# Altium PCB PCB_Oven.PcbDoc
Units mm, origin at the board's own origin, x right, y up, seen from the top; angles counter-clockwise.
Board outline 68.58 x 53.34 mm, 2 copper layers (Top Layer, Bottom Layer); 29 components, 33 nets, 124 pads, 10 vias.
Unrouted connection lines stored in the file: 3.
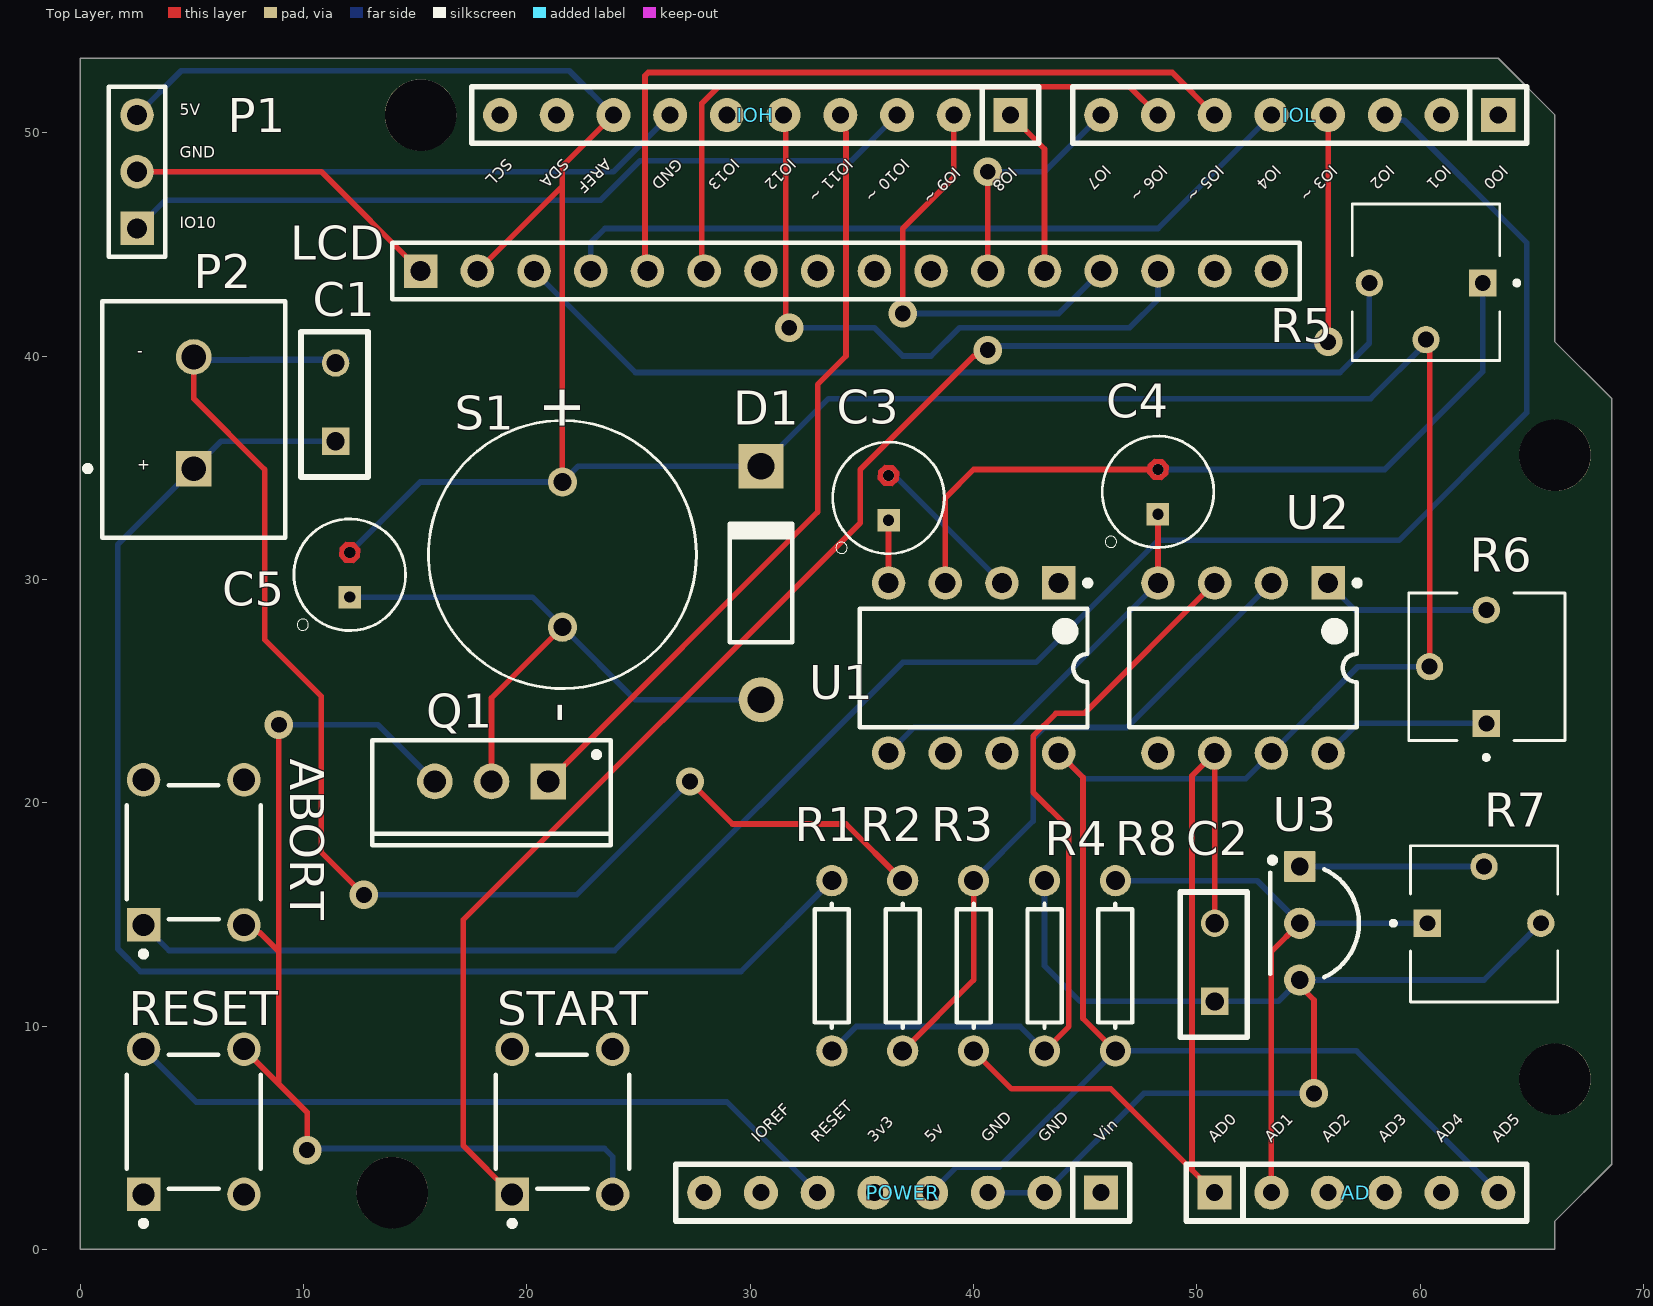
[diagram p0: Top Layer view]
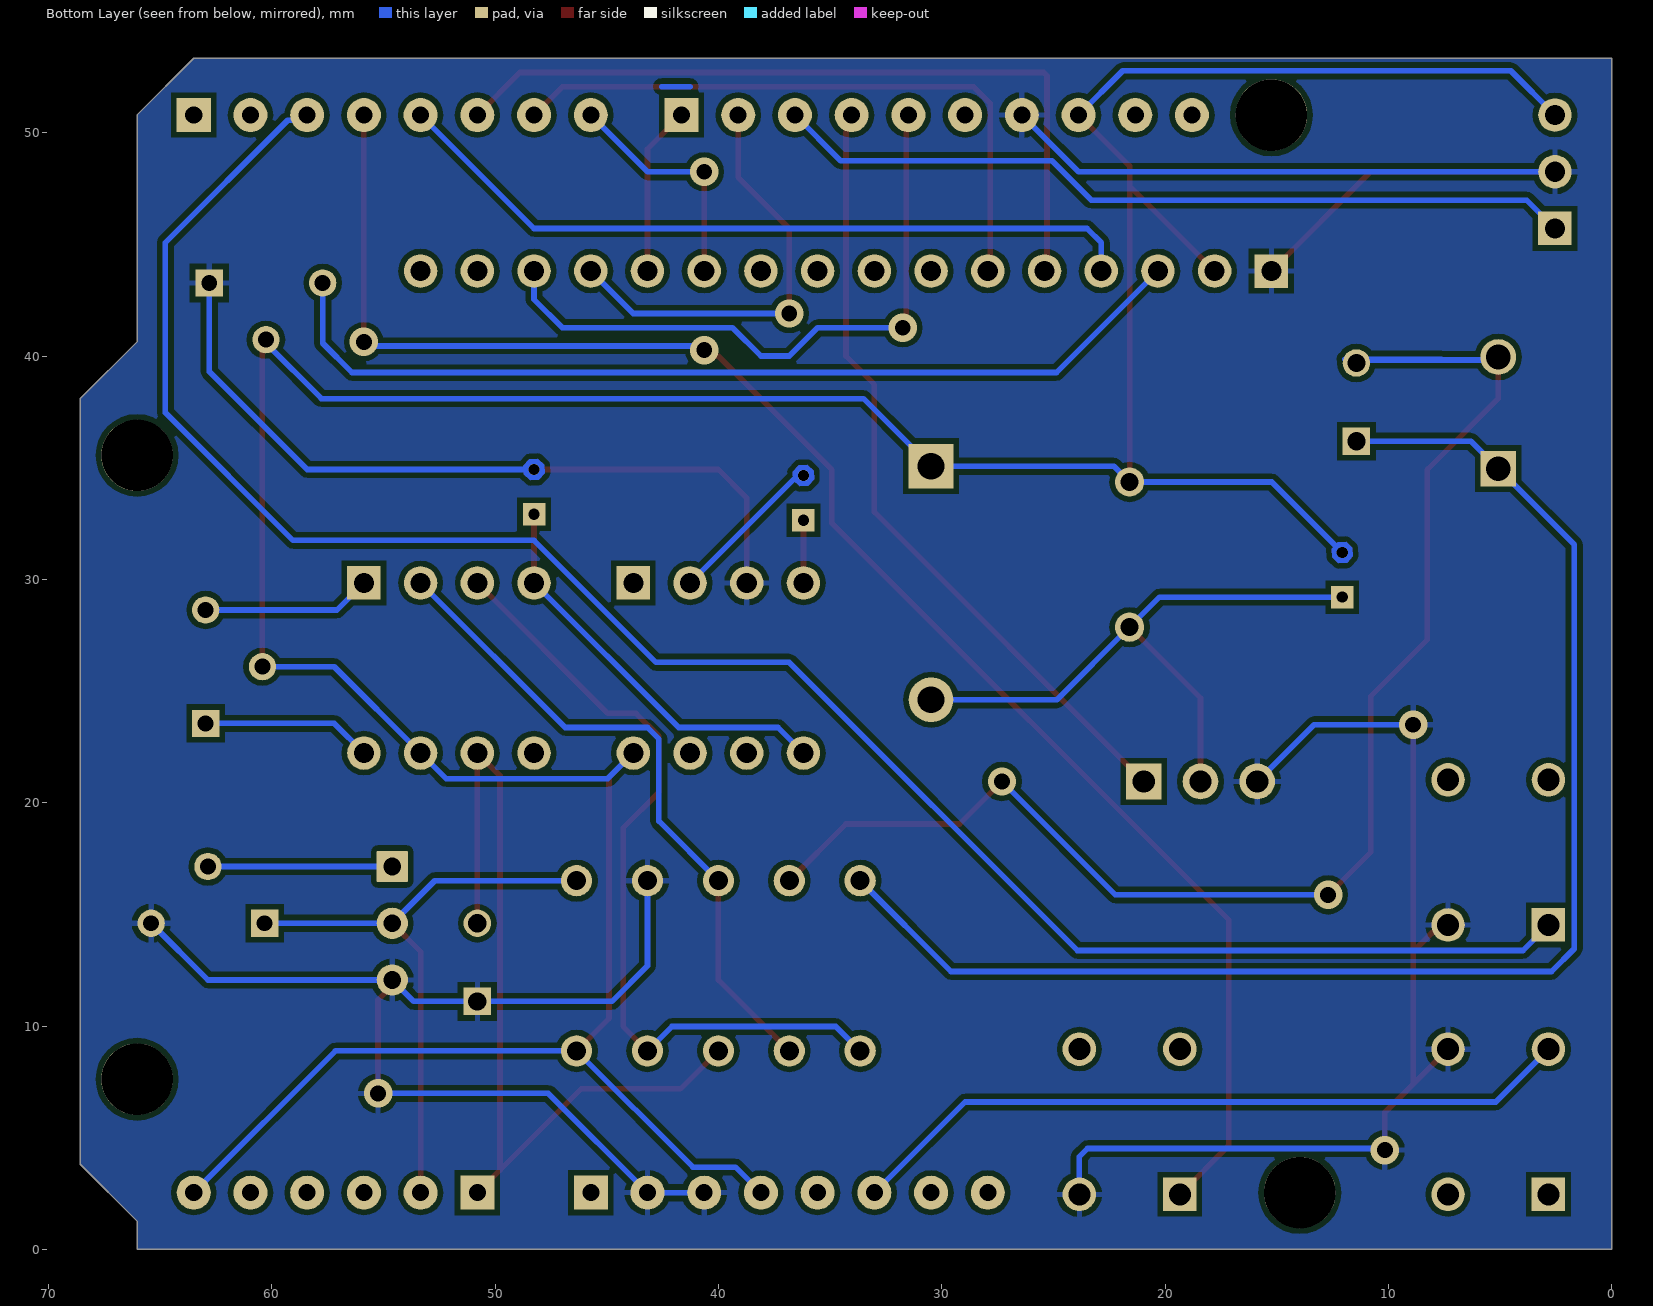
[diagram p1: Bottom Layer view, seen from below]

## Layer stack, top to bottom
Top Solder: solder mask 0.0102, Solder Resist, Dk 3.5
Top Layer: signal copper 0.0356
Dielectric1: dielectric 0.32, FR-4, Dk 4.8
Bottom Layer: signal copper 0.0356
Bottom Solder: solder mask 0.0102, Solder Resist, Dk 3.5

## Board outline
0,0 0,53.34 63.5,53.34 66.04,50.8 66.04,40.64 68.58,38.1 68.58,3.81 66.04,1.27 66.04,0

## Design rules (kind name [scope] priority, off if disabled: settings)
Clearance [All] p1: gap=0.24 ignorepadtopadclearanceinfootprint=TRUE except(0: Arc-Hole Track-Hole SMDPad-Hole THPad-Hole Via-Hole Fill-Hole Poly-Hole Region-Hole Text-Hole)
PolygonConnect PolygonConnect_1 [InNet('GND') vs IsNamedPolygon('Bottom Layer-No Net')] p1: connectstyle=Relief reliefconductorwidth=0.254 reliefentries=4 polygonreliefangle="90 Angle" airgapwidth=0.254
PolygonConnect [All] p2: connectstyle=Relief reliefconductorwidth=0.254 reliefentries=4 polygonreliefangle="90 Angle" airgapwidth=0.254
RoomDefinition PCB_Oven_Sch [InComponentClass('PCB_Oven_Sch')] p1 off: confinementstyle=ConfineIn formatcopy=TRUE lockcomponents=FALSE outline -30.48,-31.242 20.32,-31.242 20.32,-5.842 -30.48,-5.842
RoutingVias [All] p1: holewidth=0.711 width=1.27 viastyle="Through Hole" minholewidth=0.711 minwidth=1.27 maxholewidth=0.711 maxwidth=1.27
SilkToSolderMaskClearance SilkscreenOverComponentPads [IsPad] p1: minsilkscreentomaskgap=0.254 clearancetoexposedcopper=TRUE
SolderMaskExpansion [All] p1: expansion=0.102 istentingtop=FALSE
Width [All] p1: maxlimit=0.254 minlimit=0.254 preferedwidth=0.254
29 further rules are at their usual default settings.

## Components (designator, comment, footprint, x,y, rotation, side; value= is the part's Value field where it differs from the comment)
ABORT "1825910-6" TECO-1825910-6_V 5.08,17.78 r90 top
AD "AD" "Header 6x1 8.5mm" 50.8,2.54 r0 top locked
C1 "0.22uF" "0.22uF Thru hole" -206.617,103.093 r90 top value="0.22 uF"
C2 "0.22uF" "0.22uF Thru hole" -167.247,78.003 r90 top value="0.22 uF"
C3 "10uF POL" "CAP POL 10uF THRU" 36.195,33.655 r90 top value=10uF
C4 "10uF POL" "CAP POL 10uF THRU" 48.26,33.925 r90 top value=10uF
C5 "10uF POL" "CAP POL 10uF THRU" 12.065,30.21 r90 top value=10uF
D1 "Diode 1N4007" DO-41 30.48,29.845 r90 top
IOH "IOH" "Header 10x1 8.5mm" 41.656,50.8 r180 top locked
IOL "IOL" "Header 8x1 8.5mm" 63.5,50.8 r180 top locked
LCD "Header 16" HDR1X16 15.24,43.815 r0 top
P1 "Header 3" HDR1X3 2.54,45.72 r90 top
P2 "282836-2" TECO-282836-2_V 5.08,37.465 r90 top
POWER "POWER_UNO" "Header 8x1 8.5mm" 45.72,2.54 r180 top locked
Q1 "NMOS-2" TO-220AB 18.415,20.955 r180 top
R1 "Res1" AXIAL-0.3 33.655,12.7 r90 top value=330
R2 "Res1" AXIAL-0.3 36.83,12.7 r90 top value=330
R3 "Res1" AXIAL-0.3 40.005,12.7 r90 top value=100K
R4 "Res1" AXIAL-0.3 43.18,12.7 r90 top value=100K
R5 "20K" "Potentiometer 20K" 60.325,43.18 r180 top
R6 "20K" "Potentiometer 20K" 62.865,26.035 r90 top
R7 "20K" "Potentiometer 20K" 62.805,14.705 r0 top
R8 "Res1" AXIAL-0.3 46.355,12.7 r90 top value=2K
RESET "1825910-6" TECO-1825910-6_V 5.08,5.715 r90 top
S1 "CEM-1203(42) THRU" CEM-1203 21.59,31.115 r270 top
START "1825910-6" TECO-1825910-6_V 21.59,5.715 r90 top
U1 "LMC7660IN/NOPB" P0008A 40.005,26.035 r270 top
U2 "OP07CP" P0008A 52.07,26.035 r270 top
U3 "LM335Z/NOPB" LP0003A 54.61,14.605 r0 top

## Footprints (in the part's own frame and the unit in brackets; to place one, negate y for a bottom-side part, rotate by r counter-clockwise, add the part's x,y. Pads: shape width x height; smd on the part's side, far side on the other; paste and mask are expansions set on the pad)
"0.22uF Thru hole" [mm]
  rect 1.23x1.23 hole 0.82: 1(-66.898,-218.047)
  round 1.23 hole 0.82: 2(-63.398,-218.047)
  silkscreen extent -68.5,-219.5 -62,-216.5
AXIAL-0.3 [mm] "Axial Device, Thru-Hole; 2 Leads; 0.3 in Pin Spacing"
  round 1.4 hole 0.85: 1(-3.81,0) 2(3.81,0)
  silkscreen extent -2.77,-0.76 2.77,0.76
"CAP POL 10uF THRU" [mm] "Through Hole"
  rect 1.008x1.008 hole 0.5: NEG(-1,0)
  round 0.5 hole 0.5: POS(1,0)
  Top Layer region: 1.474,0.172 1.213,0.457 0.828,0.474 0.543,0.213 0.526,-0.172 0.787,-0.457 1.172,-0.474 1.457,-0.213
  Bottom Layer region: 1.474,0.172 1.213,0.457 0.828,0.474 0.543,0.213 0.526,-0.172 0.787,-0.457 1.172,-0.474 1.457,-0.213
  Multi-Layer region: 1.474,0.172 1.213,0.457 0.828,0.474 0.543,0.213 0.526,-0.172 0.787,-0.457 1.172,-0.474 1.457,-0.213
  silkscreen extent -2.5,-2.5 2.5,2.5
CEM-1203 [mm] "2048 Hz Speaker"
  round 1.308 hole 0.8: N(3.25,0) P(-3.25,0)
  silkscreen extent -6,-6 6,6
DO-41 [mm] "Diode, Axial; Body 5.2 x 2.7 mm (LxDia. max), Lead Dia. 0.86 mm (max)"
  round 2 hole 1.2: 1(-5.23,0)
  rect 2x2 hole 1.2: 2(5.23,0)
  silkscreen extent -2.65,-1.4 2.75,1.4
HDR1X3 [mm] "Connector; Header; 3 Position"
  rect 1.5x1.5 hole 0.9: 1(0,0)
  round 1.5 hole 0.9: 2(2.54,0) 3(5.08,0)
  silkscreen extent -1.27,-1.27 6.35,1.27
HDR1X16 [mm] "Connector; Header; 16 Position"
  rect 1.5x1.5 hole 0.9: 1(0,0)
  round 1.5 hole 0.9: 2(2.54,0) 3(5.08,0) 4(7.62,0) 5(10.16,0) 6(12.7,0) 7(15.24,0) 8(17.78,0) 9(20.32,0) 10(22.86,0) 11(25.4,0) 12(27.94,0) 13(30.48,0) 14(33.02,0) 15(35.56,0) 16(38.1,0)
  silkscreen extent -1.27,-1.27 39.37,1.27
"Header 6x1 8.5mm" [mil] "Stackable 6 pin header"
  rect 60x60 hole 30: 1(0,0)
  round 60 hole 30: 2(100,0) 3(200,0) 4(300,0) 5(400,0) 6(500,0)
  silkscreen extent -50,-50 550,50, body extent -50,-50 550,50, height 335
"Header 8x1 8.5mm" [mil] "Stackable 8 pin header"
  rect 60x60 hole 30: 1(0,0)
  round 60 hole 30: 2(100,0) 3(200,0) 4(300,0) 5(400,0) 6(500,0) 7(600,0) 8(700,0)
  silkscreen extent -50,-50 750,50, body extent -50,-50 750,50, height 335
"Header 10x1 8.5mm" [mil] "Stackable 10 pin header"
  rect 60x60 hole 30: 1(0,0)
  round 60 hole 30: 2(100,0) 3(200,0) 4(300,0) 5(400,0) 6(500,0) 7(600,0) 8(700,0) 9(800,0) 10(900,0)
  silkscreen extent -50,-50 950,50, body extent -50,-50 950,50, height 335
LP0003A [mm] "TO, Flat Index; 3 In-Line, Formed Axial Leads; Body Dia. 4.8mm; Leads 0.56 x 0.41 mm (max)"
  rrect7% 1.4x1.4 hole 0.8: 1(0,2.54)
  round 1.4 hole 0.8: 2(0,0) 3(0,-2.54)
  silkscreen extent -1.35,-2.41 2.65,2.95, body extent -1.33,-2.83 2.35,2.83, height 9.01
P0008A [mm] "DIP, 8-Leads, Body 10.15x6.6mm, Pitch 2.54mm"
  rect 1.5x1.5 hole 0.9: 1(-3.81,3.81)
  round 1.5 hole 0.9: 2(-3.81,1.27) 3(-3.81,-1.27) 4(-3.81,-3.81) 5(3.81,-3.81) 6(3.81,-1.27) 7(3.81,1.27) 8(3.81,3.81)
  silkscreen extent -3.93,-5.1 2.65,5.24, body extent -3.95,-5.07 3.95,5.07, height 5.08
"Potentiometer 20K" [mm]
  rect 1.222x1.222 hole 0.714: 1(-2.48,-0.1)
  round 1.222 hole 0.714: 2(0.06,2.44) 3(2.6,-0.1)
  silkscreen extent -4.1,-3.63 3.36,3.37
TECO-282836-2_V [mm] "Female Header, Pitch 5mm, 1 x 2 Position, Height 10mm"
  rect 1.6x1.6 hole 1.1: 1(-2.5,0)
  round 1.6 hole 1.1: 2(2.5,0)
  silkscreen extent -5.6,-4.1 5,4.87, body extent -5.6,-4.1 5,4.1, height 10
TECO-1825910-6_V [mm] "Switch, 4-Leads, Body 5.99x5.99mm"
  rect 1.5x1.5 hole 0.99: 1(-3.25,2.25)
  round 1.5 hole 0.99: 2(3.25,2.25) 3(-3.25,-2.25) 4(3.25,-2.25)
  silkscreen extent -4.67,-3 3,3, body extent -3,-2.99 2.99,3, height 5
TO-220AB [mm] "TO, Thru-Hole, Vertical, Heatsink Mounted; 3 In-Line Leads; Pitch 2.54 mm"
  rect 1.6x1.6 hole 1: 1(-2.54,0)
  round 1.6 hole 1: 2(0,0) 3(2.54,0)
  silkscreen extent -5.35,-1.85 5.35,2.85, body extent -5.4,-1.9 5.4,2.9, height 19.3

## Part data
ABORT RESET START: library part CMP-1684-00021-1, "Tact Switch, SPST-NO, 0.05 A, -35 to 85 degC, 4-Pin THD, RoHS, Bulk", Actuator Color=Black, Contact Rating @ Voltage=0.05A@24VDC, Dielectric Strength=500VAC, Manufacturer="TE Connectivity", Maximum AC Voltage Rating=N/A, Maximum Contact Resistance=100mOhm, Maximum DC Voltage Rating=24V, Minimum Insulation Resistance=100MOhm, Operating Temperature=-35to85C, Package Description="4-Pin Through Hole Device, Body 5.99 x 5.99 mm, Pitch 6.5 mm", Package Reference=THD, Actuator Length=1.4mm, Actuator Material=PolybutyleneTerephthalate, Actuator Style=RoundButton, Base Material=N/A, Body Orientation=Straight, Bushing Type=Unthreaded, Contact Material=CopperAlloy, Contact Plating=Silver, Datasheet URL=http://www.te.com/commerce/DocumentDelivery/DDEController?Action=showdoc&DocId=Customer+Drawing%7F1825910%7FC9%7Fpdf%7FEnglish%7FENG_CD_1825910_C9.pdf%7F1825910-6, Datasheet Version="Rev. C9", Dimension=5.99x5mm, Electrical Life=100000Cycles, Family=1825910, Function=MomentaryContact, Housing Material=N/A, Illumination=N/R, Manufacturer URL=http://www.te.com, Mechanical Life=100000Cycles, Mounting=ThroughHole, Packaging=N/A, Part No=1825910-6, Pole Throw Configuration=SPST, Product Weight=N/A, RoHS=Yes, Seal Description=N/A, Seal Location=N/A, Switch Configuration=OFF(ON), Terminal Type=PCPins, Thread Size=N/R
AD: Supplier Part Number 1=2699089, Supplier 1=Arrow, Supplier 2=Digi-Key, Supplier 3=Arrow, Supplier 4=Arrow, Supplier Part Number 2=SAM1198-06-ND, Supplier Part Number 3=2699088, Supplier Part Number 4=2699075
C1 C2: library part "CAP 0.22uF", "CAP CER 0.22UF 200V", Package="Through Hole Radial", Rating=200V, Tolerance=10%, ComponentLink1Description=digikey, ComponentLink1URL=https://www.digikey.ca/product-detail/en/kemet/C317C221K2G5TA7301/399-13974-1-ND/6562545, Digikey=399-13974-1-ND, Digikey Link=https://www.digikey.ca/product-detail/en/kemet/C317C221K2G5TA7301/399-13974-1-ND/6562545, MF=KEMET, MP=C317C221K2G5TA7301, Price="0.49 CAD"
C3 C4 C5: library part "CAP POL 10uF THRU", "CAP ALUM 10UF 20% 50V RADIAL", Package="Through Hole Radial", Tolerance=20%, Usage Rating="2000hrs @ 85C", Voltage Rating=50V, ComponentLink1Description="Digikey Link", ComponentLink1URL=https://www.digikey.ca/product-detail/en/panasonic-electronic-components/ECA-1HM100I/P10425CT-ND/8603345, Digikey PN=P10425CT-ND, MF="Panasonic Electronic Components", MP=ECA-1HM100I, Price="0.31 CAD", Type="Aluminum Electrolytic"
D1: "1 Amp General Purpose Rectifier", Code_JEDEC=DO-204-AL, ComponentLink1Description="Manufacturer Link", ComponentLink1URL=http://www.fairchildsemi.com/, ComponentLink2Description=Datasheet, ComponentLink2URL=http://www.fairchildsemi.com/ds/1N%2F1N4001.pdf, DatasheetVersion=1998, LatestRevisionDate=17-Jul-2002, LatestRevisionNote="Re-released for DXP Platform.", PackageDescription="Diode, Axial; Body 5.2 x 2.7 mm (LxDia. max), Lead Dia. 0.86 mm (max)", PackageReference=DO-41, PackageVersion=Aug-1999, Published=8-Jun-2000, Publisher="Altium Limited"
IOH: Supplier Part Number 1=2698803S4475693N1004, Supplier 1=Arrow, Supplier 2=Digi-Key, Supplier 3=Arrow, Supplier Part Number 2=SAM1198-10-ND, Supplier Part Number 3=2698789
IOL POWER: Supplier Part Number 1=SAM1198-08-ND, Supplier 1=Digi-Key, Supplier 2=Arrow, Supplier 3=Arrow, Supplier 4=Arrow
  IOL: Supplier Part Number 2=2698939, Supplier Part Number 3=2698940, Supplier Part Number 4=2698925
  POWER: Supplier Part Number 2=2698940, Supplier Part Number 3=2698925, Supplier Part Number 4=2698939
LCD: "Header, 16-Pin", LatestRevisionDate=17-Jul-2002, LatestRevisionNote="Re-released for DXP Platform.", Publisher="Altium Limited"
P1: "Header, 3-Pin", LatestRevisionDate=17-Jul-2002, LatestRevisionNote="Re-released for DXP Platform.", Publisher="Altium Limited"
P2: library part CMP-1684-00017-1, "Female Header, Pitch 5 mm, 1 x 2 Position, Height 10 mm, Tail Length 3.5 mm, Rohs, Bulk", Color=Green, Current=13.5A, Manufacturer="TE Connectivity", Package Description="Female Header, Pitch 5 mm, 1 x 2 Position, Height 10 mm, Tail Length 3.5 mm", Package Reference=THD, Standard Package=300, Voltage=300V, 3D Model=282836-2.pdf, Category=Connectors,Interconnects, Clamp Material - Plating=Brass-NickelPlated, Contact Material - Plating=Brass-TinPlated, Datasheet URL=http://www.te.com.cn/commerce/DocumentDelivery/DDEController?Action=showdoc&DocId=Catalog+Section%7F1308389_EUROSTYLE_TERMINAL_BLOCKS%7F0607%7Fpdf%7FEnglish%7FENG_CS_1308389_EUROSTYLE_TERMINAL_BLOCKS_0607.pdf%7F282836-2, Dynamic Catalog=BuchananSeries, Family=TerminalBlocks-WiretoBoard, Featured Product=EurostyleTerminalBlockConnectors, Features=Interlocking(Side), Housing Material=Polyamide(PA66),Nylon6/6, Manufacturer URL=http://www.te.com, Mating Orientation=HorizontalwithBoard, Mounting Type=ThroughHole, Number of Levels=1, Other Names="5ULV-02B / A98076", Packaging=Bulk, Pitch="0.197\"(5.00mm)", Positions Per Level=2, Product Training Modules=Wire-to-BoardEurostyleTerminalBlocks, RoHS Information=282836-2StatementofCompliance, Screw Material - Plating=Brass-NickelPlated, Screw Thread=M3, Series=Buchanan, Torque - Screw=0.68Nm(6Lb-In), Wire Gauge=16-30AWG, Wire Termination=Screw-RisingCageClamp
Q1: "N-Channel Power MOSFET", ComponentLink1Description="Manufacturer Link", ComponentLink1URL=http://www.irf.com/, DatasheetVersion=PD-9.814, LatestRevisionDate=17-Jul-2002, LatestRevisionNote="Re-released for DXP Platform.", Note="Pin 2 is electrically connected to pin 4.", PackageDescription="TO, Thru-Hole, Vertical, Heatsink Mounted; 3 In-Line Leads; Pitch 2.54 mm", PackageReference=TO-220AB, PackageVersion=Feb-1997, Published=8-Jun-2000, Publisher="Altium Limited"
R1 R2 R3 R4 R8: "Resistor", LatestRevisionDate=17-Jul-2002, LatestRevisionNote="Re-released for DXP Platform.", PackageDescription="Axial Device, Thru-Hole; 2 Leads; 0.3 in Pin Spacing", PackageReference=AXIAL-0.3, Published=8-Jun-2000, Publisher="Altium Limited"
R5 R6 R7: library part "POT 20K THRU", "TRIMMER 20K OHM 0.5W PC PIN TOP - Phillips Screw head", Package="Through Hole", ComponentLink1Description="Digikey Link", ComponentLink1URL=https://www.digikey.ca/product-detail/en/bourns-inc/3362P-1-203RLF/3362P-1-203RLFCT-ND/3767981, ComponentLink2Description="SnapEDA Link (205, since 203 DNE)", ComponentLink2URL=https://www.snapeda.com/parts/3362P-1-205LF/Bourns%20-%20J.W.%20Miller/view-part/463695/, Digikey=3362P-1-203RLF, MF="Bourns Inc.", MP=3362P-1-203RLF, Price="3.05 CAD"
S1: "35mA 2.048kHz 85dB @ 3.5V", Current Rating="35 mA @ 3.5 V", Frequency="2.048 kHz @ 3.5 V", Rated Voltage="3-5 V", ComponentLink1Description="Digikey Link", ComponentLink1URL=https://www.digikey.ca/products/en?keywords=CEM%201203%20buzzer, ComponentLink2Description="SnapEDA Link", ComponentLink2URL=https://www.snapeda.com/parts/CEM-1203%2842%29/CUI%20Devices/view-part/?ref=search&t=CEM%201203, Decibels="85 dB @ 3.5 V", Digikey PN=102-1153-ND, MF="CUI Devices", MP=CEM-1203(42), Price="1.13 CAD"
U1: library part CMP-0065-00002-3, "Switched Capacitor Voltage Converter, 8-pin MDIP, Pb-Free", Manufacturer="Texas Instruments", PackageTopMarking=NSUZXYTTE#*LMC*7660IN, PowerWise=N, Code_JEDEC=MS-001-BA, ComponentLink1Description="Datasheet URL", ComponentLink1URL=http://www.ti.com/general/docs/lit/getliterature.tsp?genericPartNumber=LMC7660&fileType=pdf, CompType="Switch Caps", PackageDescription="MDIP, .365 x .250 x .130in, 8 Lead, .100in Pitch", PackageReference=P0008A, PinCount=8, RoHS=Y
U2: library part CMP-0017-00916-2, "Low-Offset Voltage Operational Amplifier, 6 to 36 V, 0 to 70 degC, 8-pin DIP (P8), Pb-Free (RoHS)", Manufacturer="Texas Instruments", Rating=Catalog, Total Supply Voltage(Max)(+5V is 5, +/-5V is 10)=36, Total Supply Voltage(Min)(+5V is 5, +/-5V is 10)=6, CMRR(Min)(dB)=100, Code_JEDEC=MS-001, ComponentLink1Description="Manufacturer URL", ComponentLink1URL=http://www.ti.com/, ComponentLink2Description=Datasheet, ComponentLink2URL=http://www.ti.com/lit/ds/symlink/op07c.pdf, ComponentLink3Description="Package Specification", ComponentLink3URL=http://www.ti.com/litv/pdf/mpdi001b, DatasheetVersion=SLOS099E, Eco-Plan="Pb-Free (RoHS)", GBW(Typ)(MHz)=0.6, IIB(Max)(pA)=7000, Iq per channel(Max)(mA)=5, Mounting Technology="Through Hole", Number of Channels=1, Offset Drift(Typ)(uV/C)=0.5, PackageDescription="8-Pin Plastic In-Line, Body 9.59 x 6.35 mm, Pitch 2.54 mm", PackageReference=P0008A, PackageVersion="4040082/E, 04/2010", PartNumber=OP07CP, Slew Rate(Typ)(V/us)=0.3, Sub Family="General Purpose Amplifier, High Supply Voltage Amplifier (>=30V), Low Noise Amp (<=10nV/rtHz), Low Offset Voltage Amplifier (<=500uV)", Vio (25C)(Max)(mV)=0.15, Vn at 1kHz(Typ)(nV/rtHz)=9.8
U3: library part CMP-0066-00016-3, "Precision Temperature Sensor, 3-pin TO-92, Pb-Free", Manufacturer="Texas Instruments", PackageTopMarking=NSXYTT*LM335*Z, PowerWise=N, Code_JEDEC=TO-226-AA, ComponentLink1Description="Datasheet URL", ComponentLink1URL=http://www.ti.com/general/docs/lit/getliterature.tsp?genericPartNumber=LM335&fileType=pdf, CompType="Temp Sensor IC", PackageDescription="TO-92, Molded, 3 Lead", PackageReference=LP0003A, PinCount=3, RoHS=Y

## Free pads (board coordinates)
  round 3.2 hole 3.2: 0(13.97,2.54) 0(15.24,50.8) 0(66.04,7.62) 0(66.04,35.56)

## Via types
v1: diameter 1.27, hole 0.711, Top Layer to Bottom Layer, 10 vias

## Nets (pads, with @x,y where several pads share a name; then routed paths per layer and width w, separated by ;. In a path a pad name is that pad's centre, name@x,y a point inside that pad or via, vN(x,y) a via of type N, cw(c..) or ccw(c..) an arc to the next point about the centre after c; other vN are vias at no path point)
5V: AD.6 C5.POS D1.2 IOH.8 LCD.2 P1.3 POWER.4 R5.2 R6.2 R8.1 S1.P U1.8 U2.7 | length 177
  Top Layer w0.254: LCD.2 21.59,47.625 ; S1.P 21.59,47.625 ; IOH.8 21.59,48.514 21.59,47.625 ; U1.8 44.907,21.133 44.907,10.338 R8.1 ; R5.2 60.425,40.58 R6.2
  Bottom Layer w0.254: P1.3 4.521,52.781 21.895,52.781 IOH.8 ; C5.POS 15.22,34.365 S1.P 22.3,35.075 D1.2 33.505,38.1 57.785,38.1 60.265,40.58 R5.2 R5.2@60.325,40.8 ; POWER.4 39.243,3.683 41.148,3.683 R8.1 57.15,8.89 AD.6 ; U1.8 44.958,21.082 52.197,21.082 U2.7 57.21,26.095 R6.2
AD0: AD.1 C2.2 R3.1 U2.6 | length 40.1
  Top Layer w0.254: R3.1 41.707,7.188 46.152,7.188 49.784,3.556 ; AD.1 49.784,3.556 ; C2.2 U2.6 49.784,21.209 49.784,3.556
AD1: AD.2 R7.1 R8.2 U3.2 | length 27.4
  Top Layer w0.254: AD.2 53.34,13.335 U3.2
  Bottom Layer w0.254: R8.2 52.705,16.51 U3.2 R7.1
GND: ABORT.3 C2.1 C4.POS IOH.7 LCD.1 P1.2 POWER.2 POWER.3 Q1.3 R4.2 R5.1 R7.3 RESET.4 START.3 U1.3 U3.3 | length 171
  Top Layer w0.254: P1.2 10.795,48.26 LCD.1 ; RESET.4 8.89,7.405 ; ABORT.3 7.667,14.53 8.03,14.167 8.058,14.167 8.89,13.335 ; v1(8.89,23.495) 8.89,13.335 ; v1(10.16,4.445) 10.16,6.135 8.89,7.405 ; U1.3 38.735,33.655 40.005,34.925 C4.POS ; U3.3 54.61,11.806 55.245,11.171 v1(55.245,6.985) ; 8.89,7.405 8.89,13.335
  Bottom Layer w0.254: P1.2 23.876,48.26 IOH.7 ; v1(8.89,23.495) 13.335,23.495 Q1.3 ; v1(10.16,4.445) 10.236,4.521 23.474,4.521 23.84,4.155 START.3 ; POWER.3 POWER.2 47.625,6.985 v1(55.245,6.985) ; R4.2 43.18,12.7 44.775,11.105 C2.1 53.65,11.105 U3.3 62.865,12.065 R7.3 ; C4.POS 58.42,34.925 62.805,39.31 R5.1
IO0: IOL.1
IO1: IOL.2
IO2: ABORT.1 IOL.3 | length 88.7
  Bottom Layer w0.254: ABORT.1 3.974,13.386 23.927,13.386 36.83,26.289 42.799,26.289 48.26,31.75 59.055,31.75 64.77,37.465 64.77,45.085 59.292,50.563 58.657,50.563 IOL.3
IO3: IOL.4 START.1 | length 74.2
  Top Layer w0.254: START.1 17.145,4.66 17.145,14.757 34.925,32.537 34.925,34.925 39.995,39.995 40.087,39.995 40.365,40.273 v1(40.64,40.273) ; v1(55.88,40.64) IOL.4
  Bottom Layer w0.254: v1(40.64,40.273) 40.823,40.457 55.697,40.457 v1(55.88,40.64)
IO4: IOL.5 LCD.4 | length 34.1
  Bottom Layer w0.254: LCD.4 22.86,45.085 23.495,45.72 48.26,45.72 IOL.5
IO5: IOL.6 LCD.5 | length 35.1
  Top Layer w0.254: LCD.5 25.287,43.928 25.287,52.556 25.432,52.701 48.899,52.701 IOL.6
IO6: IOL.7 LCD.6 | length 28.8
  Top Layer w0.254: LCD.6 27.827,43.928 27.827,51.322 28.575,52.07 46.99,52.07 IOL.7
IO7: IOL.8 LCD.11 | length 10.9
  Top Layer w0.254: LCD.11 v1(40.64,48.26) ; IOL.8@45.486,50.566 IOL.8
  Bottom Layer w0.254: v1(40.64,48.26) 43.18,48.26 IOL.8
IO8: IOH.1 LCD.12 | length 7.6
  Top Layer w0.254: IOH.1 43.18,49.276 LCD.12
IO9: IOH.2 LCD.13 | length 19.5
  Top Layer w0.254: v1(36.83,41.91) 36.83,45.72 39.116,48.006 IOH.2
  Bottom Layer w0.254: v1(36.83,41.91) 43.815,41.91 LCD.13
IO10: IOH.3 P1.1 | length 36.1
  Bottom Layer w0.254: P1.1 3.81,46.99 23.305,46.99 25.069,48.754 34.53,48.754 IOH.3
IO11: IOH.4 Q1.1 | length 35.5
  Top Layer w0.254: Q1.1 33.02,33.02 33.02,38.735 34.29,40.005 34.29,50.016 34.279,50.027 34.279,50.557 IOH.4
IO12: IOH.5 LCD.14 | length 29
  Top Layer w0.254: IOH.5 31.597,50.699 31.597,41.428 v1(31.75,41.275)
  Bottom Layer w0.254: v1(31.75,41.275) 35.56,41.275 36.83,40.005 38.1,40.005 39.37,41.275 46.99,41.275 48.26,42.545 LCD.14
IO13: IOH.6
NetC1_1: C1.1 P2.1 R1.2 | length 63.9
  Bottom Layer w0.254: C1.1 11.442,36.192 11.43,36.192 6.307,36.192 P2.1 1.676,31.561 1.676,13.462 2.692,12.446 29.591,12.446 R1.2
NetC1_2: C1.2 P2.2 R2.2 | length 71.2
  Top Layer w0.254: P2.2 5.08,38.1 8.255,34.925 8.255,27.305 10.795,24.765 10.795,17.78 v1(12.7,15.875) ; v1(27.305,20.955) 29.21,19.05 34.29,19.05 R2.2
  Bottom Layer w0.254: C1.2 11.442,39.692 11.435,39.7 11.306,39.828 P2.2@5.08,39.828 ; C1.2@11.941,39.868 11.43,39.868 7.62,39.868 ; v1(12.7,15.875) 22.225,15.875 v1(27.305,20.955) ; P2.2@5.08,39.828 P2.2@5.082,39.828 ; P2.2@5.08,39.828 P2.2@5.082,39.828 ; P2.2@5.082,39.828 7.62,39.868 ; P2.2@5.082,39.828 7.62,39.868
NetC3_NEG: C3.NEG U1.4 | length 2.8
  Top Layer w0.254: U1.4 C3.NEG
NetC3_POS: C3.POS U1.2 | length 7.1
  Bottom Layer w0.254: C3.POS 36.465,34.655 U1.2
NetC4_NEG: C4.NEG U1.5 U2.4 | length 18.3
  Top Layer w0.254: U2.4 C4.NEG
  Bottom Layer w0.254: U1.5 37.338,23.368 41.783,23.368 U2.4
NetC5_NEG: C5.NEG D1.1 Q1.2 S1.N | length 28.5
  Top Layer w0.254: Q1.2 18.415,24.69 S1.N
  Bottom Layer w0.254: C5.NEG 20.245,29.21 S1.N 24.84,24.615 D1.1
NetLCD_3: LCD.3 R5.3 | length 42.5
  Bottom Layer w0.254: LCD.3 24.864,39.271 56.416,39.271 57.725,40.58 R5.3
NetR1_1: R1.1 R4.1 U2.3 | length 36.6
  Top Layer w0.254: R4.1 44.272,9.982 44.272,18.872 42.672,20.472 42.672,22.987 43.688,24.003 44.958,24.003 U2.3
  Bottom Layer w0.254: R1.1 34.747,9.982 42.088,9.982 R4.1
NetR2_1: R2.1 R3.2 U2.2 | length 30
  Top Layer w0.254: R2.1 40.005,12.065 R3.2
  Bottom Layer w0.254: R3.2 42.672,19.177 42.672,22.86 43.18,23.368 46.863,23.368 U2.2
NetR6_1: R6.1 U2.8 | length 7.6
  Bottom Layer w0.254: U2.8 57.21,23.555 R6.1
NetR6_3: R6.3 U2.1 | length 7.6
  Bottom Layer w0.254: U2.1 57.09,28.635 R6.3
NetR7_2: R7.2 U3.1 | length 8.3
  Bottom Layer w0.254: U3.1 R7.2
RESET: POWER.6 RESET.2 | length 32.9
  Bottom Layer w0.254: RESET.2 5.191,6.604 28.956,6.604 POWER.6
SCL: IOH.10
SDA: IOH.9
pads on no net: ABORT.2 ABORT.4 AD.3 AD.4 AD.5 LCD.7 LCD.8 LCD.9 LCD.10 LCD.15 LCD.16 POWER.1 POWER.5 POWER.7 POWER.8 RESET.1 RESET.3 START.2 START.4 U1.1 U1.6 U1.7 U2.5
copper on no net: | length 1.3
  Bottom Layer w0.254: 41.275,52.07 42.545,52.07

## Polygon pours and split planes (outlines as drawn)
GND on Bottom Layer "GND" (solid, pour order 11): 0,53.34 0,0 66.04,0 66.04,1.27 68.58,3.81 68.58,38.1 66.04,40.64 66.04,50.8 63.5,53.34

## Silkscreen, mask and mechanical layers (free items; w line width, h text height)
Top Overlay:
  text "5V" at 4.445,50.8 h0.51
  text "GND" at 4.445,48.895 h0.51
  text "SCL" at 19.05,48.895 h0.51 r225
  text "SDA" at 21.59,48.895 h0.51 r225
  text "AREF" at 23.495,48.895 h0.51 r225
  text "GND" at 26.67,48.895 h0.51 r225
  text "IO13" at 29.21,48.895 h0.51 r225
  text "IO12" at 31.75,48.895 h0.51 r225
  text "IO11 ~" at 34.29,48.895 h0.51 r225
  text "IO10 ~" at 36.83,48.895 h0.51 r225
  text "IO7" at 45.847,48.588 h0.51 r225
  text "IO6 ~" at 48.387,48.588 h0.51 r225
  text "IO5 ~" at 50.927,48.588 h0.51 r225
  text "IO4" at 53.467,48.588 h0.51 r225
  text "IO3 ~" at 56.007,48.588 h0.51 r225
  text "IO2" at 58.547,48.588 h0.51 r225
  text "IO1" at 61.087,48.588 h0.51 r225
  text "IO0" at 63.627,48.588 h0.51 r225
  text "IO9 ~" at 39.116,48.514 h0.51 r225
  text "IO8" at 41.656,48.514 h0.51 r225
  text "IO10" at 4.445,45.72 h0.51
  text "-" at 2.54,40.005 h0.51
  text "+" at 2.54,34.925 h0.51
  text "IOREF" at 30.353,4.752 h0.51 r45
  text "RESET" at 33.02,4.752 h0.51 r45
  text "3v3" at 35.56,4.752 h0.51 r45
  text "5v" at 38.1,4.752 h0.51 r45
  text "GND" at 40.64,4.752 h0.51 r45
  text "GND" at 43.18,4.752 h0.51 r45
  text "Vin" at 45.72,4.752 h0.51 r45
  text "AD0" at 50.8,4.752 h0.51 r45
  text "AD1" at 53.34,4.752 h0.51 r45
  text "AD2" at 55.88,4.752 h0.51 r45
  text "AD3" at 58.42,4.752 h0.51 r45
  text "AD4" at 60.96,4.752 h0.51 r45
  text "AD5" at 63.5,4.752 h0.51 r45
Mechanical 1:
  circle w0.127: c15.24,50.8 r1.6
  circle w0.127: c66.04,7.62 r1.6
  circle w0.127: c13.97,2.54 r1.6
  circle w0.127: c66.04,35.56 r1.6

## Text inside footprints (layer, text, board x,y; h text height)
S1: Top Overlay "-" at 20.769,24.507 h1.88 r270; Top Overlay "+" at 20.769,38.77 h1.88 r270